# Allegro board ad9910db.brd
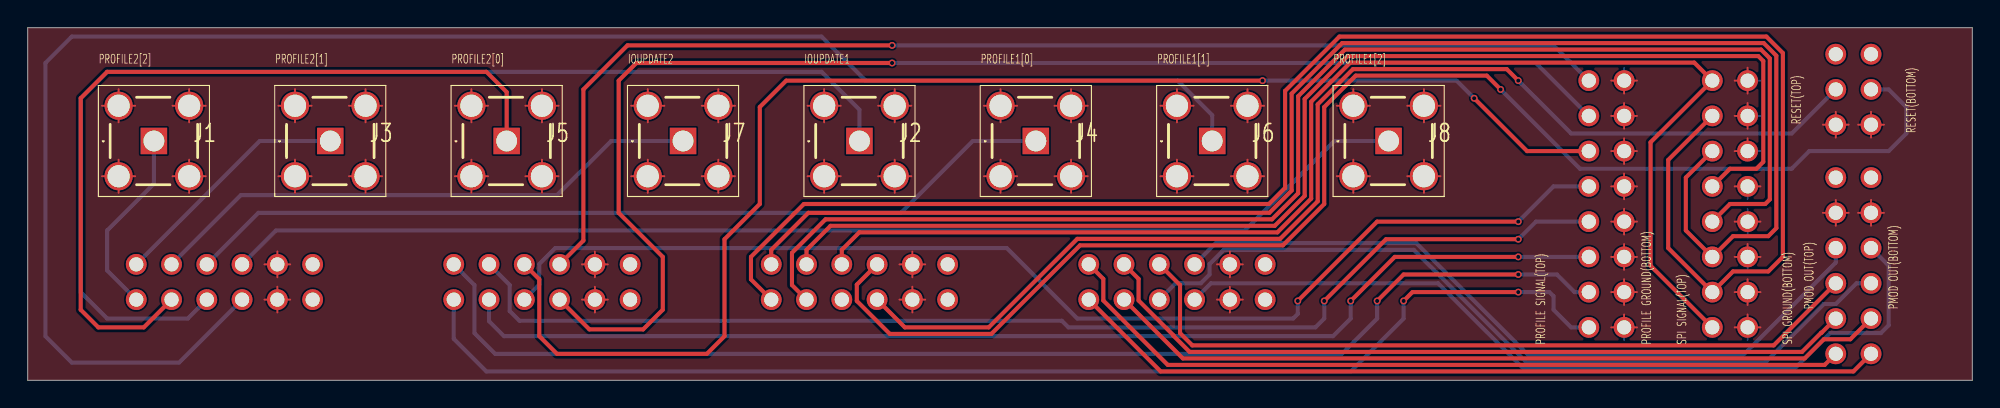
[diagram p0: board, top side]
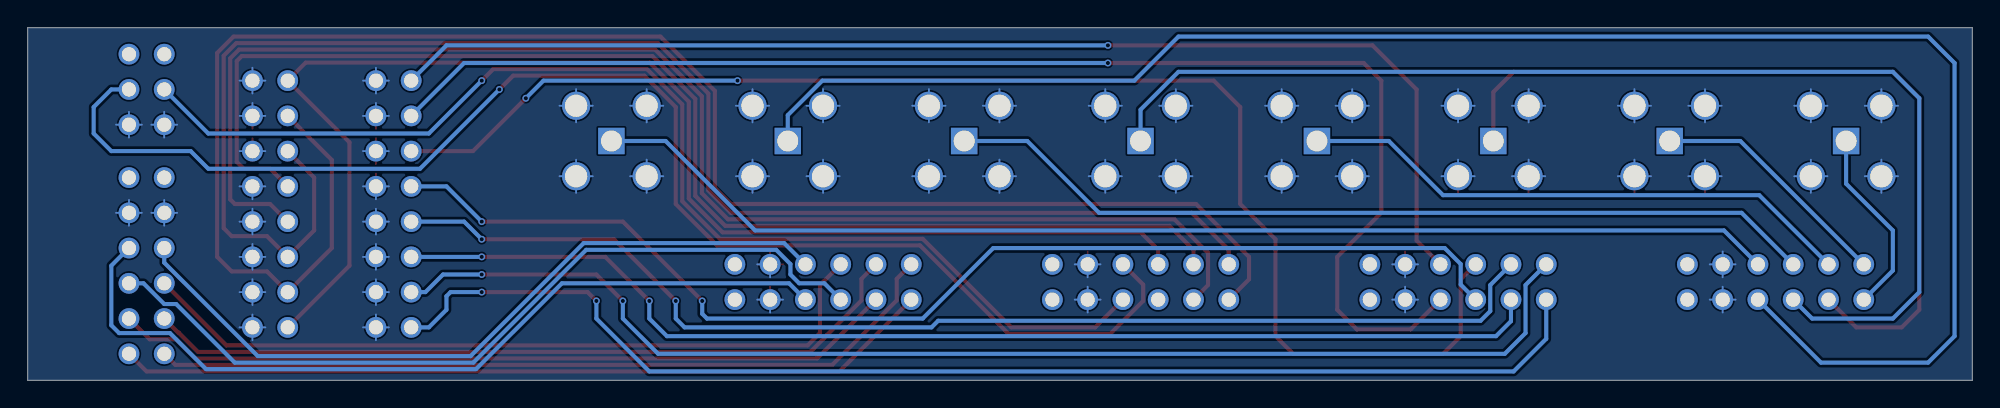
[diagram p1: board, bottom side, seen from below]

Outline 140 x 25.4 mm; copper layers: TOP, LAYER_1, LAYER_2, BOTTOM. Coordinates in mm from the lower left corner of the outline.
Outline path: 0,25.4 140,25.4 140,0 0,0 0,25.4

## Design rules (mm)
constraint set DEFAULT: min track width 0.127

## Placement (name value [footprint] x y rotation side)
J1  -  [SMA-KE-10]  9.08 17.24 0 top
J2  -  [SMA-KE-10]  59.88 17.24 0 top
J3  -  [SMA-KE-10]  21.78 17.24 0 top
J4  -  [SMA-KE-10]  72.58 17.24 0 top
J5  -  [SMA-KE-10]  34.48 17.24 0 top
J6  -  [SMA-KE-10]  85.28 17.24 0 top
J7  -  [SMA-KE-10]  47.18 17.24 0 top
J8  -  [SMA-KE-10]  97.98 17.24 0 top
J9  -  [XDZ254-2-08-Z-2_5-G1]  122.56 12.7 90 top
J10  -  [HB-PH8-25426PB2GOP]  131.44 8.26 90 top
J11  -  [XDZ254-2-08-Z-2_5-G1]  113.67 12.7 90 top
J12  -  [PH-00064]  131.44 20.95 90 top
J13  -  [HB-PH8-25426PB2GOP]  59.88 7.08 0 top
J14  -  [HB-PH8-25426PB2GOP]  37.02 7.08 0 top
J15  -  [HB-PH8-25426PB2GOP]  82.74 7.08 0 top
J16  -  [HB-PH8-25426PB2GOP]  14.16 7.08 0 top

## Library data of the parts
J1-J8 = SMA-KE-10
J9 J11 = XDZ254-2-08-Z-2_5-G1
J10 J13-J16 = HB-PH8-25426PB2GOP
J12 = PH-00064

## Footprints (pads in the part's own frame, mm; a bottom-side part is the same pattern mirrored in y, then rotated)
HB-PH8-25426PB2GOP
  round 1.5 hole 1.02: 1(-6.35,-1.27) 2(-6.35,1.27) 3(-3.81,-1.27) 4(-3.81,1.27) 5(-1.27,-1.27) 6(-1.27,1.27) 7(1.27,-1.27) 8(1.27,1.27) 9(3.81,-1.27) 10(3.81,1.27) 11(6.35,-1.27) 12(6.35,1.27)
PH-00064
  round 1.5 hole 1.02: 1(-2.54,-1.27) 2(-2.54,1.27) 3(0,-1.27) 4(0,1.27) 5(2.54,-1.27) 6(2.54,1.27)
SMA-KE-10
  round 2.032 hole 1.6: 1(2.54,2.54) 2(-2.54,2.54) 3(-2.54,-2.54) 4(2.54,-2.54)
  rect 1.905x1.905 hole 1.501: 5(0,0)
XDZ254-2-08-Z-2_5-G1
  round 1.5 hole 1.02: 1(-8.89,-1.27) 2(-8.89,1.27) 3(-6.35,-1.27) 4(-6.35,1.27) 5(-3.81,-1.27) 6(-3.81,1.27) 7(-1.27,-1.27) 8(-1.27,1.27) 9(1.27,-1.27) 10(1.27,1.27) 11(3.81,-1.27) 12(3.81,1.27) 13(6.35,-1.27) 14(6.35,1.27) 15(8.89,-1.27) 16(8.89,1.27)

## Nets
GND: J1.1 J1.2 J1.3 J1.4 J2.1 J2.2 J2.3 J2.4 J3.1 J3.2 J3.3 J3.4 J4.1 J4.2 J4.3 J4.4 J5.1 J5.2 J5.3 J5.4 J6.1 J6.2 J6.3 J6.4 J7.1 J7.2 J7.3 J7.4 J8.1 J8.2 J8.3 J8.4 J9.1 J9.3 J9.5 J9.7 J9.9 J9.11 J9.13 J9.15 J10.9 J10.10 J11.1 J11.3 J11.5 J11.7 J11.9 J11.11 J11.13 J11.15 J12.1 J12.2 J13.9 J13.10 J14.9 J14.10 J15.9 J15.10 J16.9 J16.10
CSB1: J9.10 J13.4
CSB2: J9.8 J13.3
CSB3: J10.3 J15.3
CSB4: J10.4 J15.4
EXT_IOUPDATE1: J2.5(IO) J16.5
EXT_IOUPDATE2: J7.5(IO) J16.4
EXT_PROFILE1_0: J4.5(IO) J16.6
EXT_PROFILE1_1: J6.5(IO) J16.7
EXT_PROFILE1_2: J8.5(IO) J16.8
EXT_PROFILE2_0: J5.5(IO) J16.3
EXT_PROFILE2_1: J3.5(IO) J16.2
EXT_PROFILE2_2: J1.5(IO) J16.1
EXT_PWR_DOWN1: J12.4 J13.7
EXT_PWR_DOWN2: J12.3 J13.8
EXT_PWR_DOWN3: J10.7 J15.7
EXT_PWR_DOWN4: J10.8 J15.8
FPGA_RESET: J10.5 J15.5
IOUPDATE1: J11.8 J14.4
IOUPDATE2: J11.10 J14.5
MASTERRESET1: J9.2 J9.16 J13.6
MASTERRESET2: J10.6 J15.6
PROFILE1_0: J11.6 J14.3
PROFILE1_1: J11.4 J14.2
PROFILE1_2: J11.2 J14.1
PROFILE2_0: J11.12 J14.6
PROFILE2_1: J11.14 J14.7
PROFILE2_2: J11.16 J14.8
SCLK1: J9.6 J9.12 J13.2
SCLK2: J10.2 J15.2
SDIO1: J9.4 J9.14 J13.1
SDIO2: J10.1 J15.1

Pads without a net: J10 11 12; J12 5 6; J13 5 11 12; J14 11 12; J15 11 12; J16 11 12

## Via types
v1: diameter 0.5, hole 0.3, TOP to BOTTOM, 16 vias

## Routing (per net, layer and track width the routed paths; a pad name or vN(x,y) marks a point on that pad's centre or on a via; arc(x,y) is an arc through that point)
GND: length 999.1
  TOP w0.127: J13.9 63.69,6.74 ; J13.9 63.69,4.88 ; J13.9 62.76,5.81 ; J13.9 64.62,5.81 ; 17.97,7.42 J16.10 ; J16.10 18.9,8.35 ; J16.10 17.04,8.35 ; J16.10 17.97,9.28 ; 129.25,12.06 130.18,12.06 ; 130.18,12.06 131.1,12.06 ; 130.18,12.06 130.18,12.99 ; 130.18,12.06 130.18,11.14 ; 19.24,13.51 J3.3 ; J3.3 18.05,14.7 ; J3.3 19.24,15.89 ; J3.3 20.43,14.7 ; J5.4 38.21,14.7 ; J5.4 37.02,15.89 ; J5.4 37.02,13.51 ; J5.4 35.83,14.7 ; J3.4 24.32,15.89 ; J3.4 25.51,14.7 ; J3.4 24.32,13.51 ; J3.4 23.13,14.7 ; J2.1 62.42,20.97 ; J2.1 62.42,18.59 ; J2.1 61.23,19.78 ; J2.1 63.61,19.78 ; 57.34,13.51 J2.3 ; J2.3 57.34,15.89 ; J2.3 56.15,14.7 ; J2.3 58.53,14.7 ; J1.3 7.73,14.7 ; J1.3 6.54,15.89 ; J1.3 6.54,13.51 ; J1.3 5.35,14.7 ; J11.7 115.86,11.43 ; J11.7 114.94,12.36 ; J11.7 114.94,10.5 ; J11.7 114.01,11.43 ; 131.79,18.41 J12.1 ; J12.1 133.64,18.41 ; J12.1 132.72,17.49 ; J12.1 132.72,19.34 ; 124.75,11.43 J9.7 122.9,11.43 ; 70.04,13.51 J4.3 ; J4.3 68.85,14.7 ; J4.3 70.04,15.89 ; J4.3 71.23,14.7 ; J1.1 12.81,19.78 ; J1.1 10.43,19.78 ; J1.1 11.62,20.97 ; J1.1 11.62,18.59 ; J6.2 83.93,19.78 ; J6.2 82.74,20.97 ; J6.2 82.74,18.59 ; J6.2 81.55,19.78 ; 100.52,18.59 J8.1 ; J8.1 100.52,20.97 ; J8.1 101.71,19.78 ; J8.1 99.33,19.78 ; 48.53,19.78 J7.1 ; J7.1 49.72,20.97 ; J7.1 49.72,18.59 ; J7.1 50.91,19.78 ; J7.3 45.83,14.7 ; J7.3 44.64,15.89 ; J7.3 44.64,13.51 ; J7.3 43.45,14.7 ; J8.2 95.44,20.97 ; J8.2 96.63,19.78 ; J8.2 94.25,19.78 ; J8.2 95.44,18.59 ; J3.2 19.24,20.97 ; J3.2 18.05,19.78 ; J3.2 19.24,18.59 ; J3.2 20.43,19.78 ; J11.3 114.94,7.28 ; J11.3 115.86,6.35 ; J11.3 114.01,6.35 ; J11.3 114.94,5.42 ; 122.9,16.51 J9.11 123.83,17.44 ; J11.5 114.94,9.82 ; J11.5 114.94,7.96 ; J11.5 115.86,8.89 ; J11.5 114.01,8.89 ; 17.97,4.88 J16.9 ; J16.9 17.04,5.81 ; J16.9 18.9,5.81 ; J16.9 17.97,6.74 ; 82.74,13.51 J6.3 ; J6.3 83.93,14.7 ; J6.3 81.55,14.7 ; J6.3 82.74,15.89 ; 86.63,19.78 J6.1 ; J6.1 89.01,19.78 ; J6.1 87.82,18.59 ; J6.1 87.82,20.97 ; 39.9,8.35 J14.10 ; J14.10 40.83,9.28 ; J14.10 40.83,7.42 ; J14.10 41.76,8.35 ; J5.3 31.94,15.89 ; J5.3 30.75,14.7 ; J5.3 31.94,13.51 ; J5.3 33.13,14.7 ; J8.3 95.44,15.89 ; J8.3 95.44,13.51 ; J8.3 94.25,14.7 ; J8.3 96.63,14.7 ; J15.10 87.48,8.35 ; J15.10 86.55,9.28 ; J15.10 85.62,8.35 ; J15.10 86.55,7.42 ; J11.11 114.94,17.44 ; J11.11 115.86,16.51 ; J11.11 114.01,16.51 ; J11.11 114.94,15.58 ; 131.79,12.06 132.72,12.06 ; 132.72,12.06 133.64,12.06 ; 132.72,12.06 132.72,11.14 ; 132.72,12.06 132.72,12.99 ; 31.94,18.59 J5.2 ; J5.2 31.94,20.97 ; J5.2 33.13,19.78 ; J5.2 30.75,19.78 ; J6.4 89.01,14.7 ; J6.4 87.82,15.89 ; J6.4 87.82,13.51 ; J6.4 86.63,14.7 ; J1.2 7.73,19.78 ; J1.2 6.54,20.97 ; J1.2 6.54,18.59 ; J1.2 5.35,19.78 ; 123.83,18.12 J9.13 ; J9.13 123.83,19.98 ; J9.13 122.9,19.05 ; 122.9,13.97 J9.9 124.75,13.97 ; J14.9 40.83,6.74 ; J14.9 40.83,4.88 ; J14.9 39.9,5.81 ; J14.9 41.76,5.81 ; J2.2 57.34,20.97 ; J2.2 57.34,18.59 ; J2.2 56.15,19.78 ; J2.2 58.53,19.78 ; J3.1 25.51,19.78 ; J3.1 24.32,18.59 ; J3.1 24.32,20.97 ; J3.1 23.13,19.78 ; J4.4 76.31,14.7 ; J4.4 73.93,14.7 ; J4.4 75.12,13.51 ; J4.4 75.12,15.89 ; J9.1 124.75,3.81 ; J9.1 122.9,3.81 ; J9.1 123.83,4.74 ; J11.9 114.94,14.9 ; J11.9 114.94,13.04 ; J11.9 114.01,13.97 ; J11.9 115.86,13.97 ; J15.9 87.48,5.81 ; J15.9 86.55,6.74 ; J15.9 86.55,4.88 ; J15.9 85.62,5.81 ; J7.2 44.64,20.97 ; J7.2 44.64,18.59 ; J7.2 45.83,19.78 ; J7.2 43.45,19.78 ; 114.94,18.12 J11.13 ; J11.13 114.01,19.05 ; J11.13 114.94,19.98 ; J11.13 115.86,19.05 ; 122.9,6.35 J9.3 ; J9.3 123.83,7.28 ; J9.3 124.75,6.35 ; J9.3 123.83,5.42 ; 99.33,14.7 J8.4 ; J8.4 100.52,13.51 ; J8.4 100.52,15.89 ; J8.4 101.71,14.7 ; J9.5 124.75,8.89 ; J9.5 122.9,8.89 ; J9.5 123.83,9.82 ; J1.4 12.81,14.7 ; J1.4 11.62,13.51 ; J1.4 11.62,15.89 ; J1.4 10.43,14.7 ; 63.69,7.42 J13.10 ; J13.10 62.76,8.35 ; J13.10 64.62,8.35 ; J13.10 63.69,9.28 ; J4.2 70.04,20.97 ; J4.2 71.23,19.78 ; J4.2 70.04,18.59 ; J4.2 68.85,19.78 ; 130.18,18.41 131.1,18.41 ; 130.18,18.41 129.25,18.41 ; 130.18,18.41 130.18,19.34 ; 130.18,18.41 130.18,17.49 ; J9.15 123.83,22.52 ; J9.15 122.9,21.59 ; J9.15 123.83,20.66 ; J7.4 50.91,14.7 ; J7.4 49.72,13.51 ; J7.4 49.72,15.89 ; J7.4 48.53,14.7 ; J2.4 62.42,15.89 ; J2.4 62.42,13.51 ; J2.4 63.61,14.7 ; J2.4 61.23,14.7 ; 35.83,19.78 J5.1 ; J5.1 37.02,18.59 ; J5.1 38.21,19.78 ; J5.1 37.02,20.97 ; 75.12,18.59 J4.1 ; J4.1 73.93,19.78 ; J4.1 75.12,20.97 ; J4.1 76.31,19.78 ; J11.1 115.86,3.81 ; J11.1 114.94,4.74 ; J11.1 114.01,3.81 ; 114.94,20.66 J11.15 ; J11.15 114.01,21.59 ; J11.15 115.86,21.59
  LAYER_1 w0.127: 81.55,14.7 J6.3 ; J6.3 82.74,15.89 ; J6.3 82.74,13.51 ; J6.3 83.93,14.7 ; 56.15,14.7 J2.3 ; J2.3 58.53,14.7 ; J2.3 57.34,13.51 ; J2.3 57.34,15.89 ; 123.83,5.42 J9.3 ; J9.3 123.83,7.28 ; J9.3 124.75,6.35 ; J9.3 122.9,6.35 ; 56.15,19.78 J2.2 ; J2.2 58.53,19.78 ; J2.2 57.34,18.59 ; J2.2 57.34,20.97 ; J1.1 11.62,20.97 ; J1.1 10.43,19.78 ; J1.1 11.62,18.59 ; J1.1 12.81,19.78 ; 63.69,7.42 J13.10 ; J13.10 64.62,8.35 ; J13.10 63.69,9.28 ; J13.10 62.76,8.35 ; J8.1 100.52,20.97 ; J8.1 101.71,19.78 ; J8.1 99.33,19.78 ; J8.1 100.52,18.59 ; J6.1 87.82,20.97 ; J6.1 86.63,19.78 ; J6.1 89.01,19.78 ; J6.1 87.82,18.59 ; 122.9,8.89 J9.5 ; J9.5 124.75,8.89 ; J9.5 123.83,9.82 ; J9.5 123.83,7.96 ; J14.10 41.76,8.35 ; J14.10 39.9,8.35 ; J14.10 40.83,9.28 ; J14.10 40.83,7.42 ; J15.9 87.48,5.81 ; J15.9 85.62,5.81 ; J15.9 86.55,4.88 ; J15.9 86.55,6.74 ; 24.32,18.59 J3.1 ; J3.1 24.32,20.97 ; J3.1 25.51,19.78 ; J3.1 23.13,19.78 ; 114.94,2.88 J11.1 ; J11.1 114.94,4.74 ; J11.1 115.86,3.81 ; J11.1 114.01,3.81 ; J9.15 123.83,22.52 ; J9.15 122.9,21.59 ; J9.15 124.75,21.59 ; J9.15 123.83,20.66 ; 130.18,11.14 130.18,12.06 ; 130.18,12.06 131.1,12.06 ; 130.18,12.06 129.25,12.06 ; 130.18,12.06 130.18,12.99 ; 19.24,13.51 J3.3 ; J3.3 20.43,14.7 ; J3.3 18.05,14.7 ; J3.3 19.24,15.89 ; J12.1 133.64,18.41 ; J12.1 131.79,18.41 ; J12.1 132.72,19.34 ; J12.1 132.72,17.49 ; 70.04,13.51 J4.3 ; J4.3 70.04,15.89 ; J4.3 71.23,14.7 ; J4.3 68.85,14.7 ; J9.9 124.75,13.97 ; J9.9 123.83,14.9 ; J9.9 123.83,13.04 ; J9.9 122.9,13.97 ; 86.63,14.7 J6.4 ; J6.4 87.82,15.89 ; J6.4 89.01,14.7 ; J6.4 87.82,13.51 ; J4.1 76.31,19.78 ; J4.1 75.12,18.59 ; J4.1 75.12,20.97 ; J4.1 73.93,19.78 ; J7.2 45.83,19.78 ; J7.2 44.64,20.97 ; J7.2 43.45,19.78 ; J7.2 44.64,18.59 ; J4.4 75.12,15.89 ; J4.4 73.93,14.7 ; J4.4 76.31,14.7 ; J4.4 75.12,13.51 ; 114.01,13.97 J11.9 ; J11.9 115.86,13.97 ; J11.9 114.94,14.9 ; J11.9 114.94,13.04 ; J11.5 115.86,8.89 ; J11.5 114.94,9.82 ; J11.5 114.94,7.96 ; J11.5 114.01,8.89 ; J3.4 25.51,14.7 ; J3.4 24.32,15.89 ; J3.4 24.32,13.51 ; J3.4 23.13,14.7 ; J5.2 33.13,19.78 ; J5.2 30.75,19.78 ; J5.2 31.94,18.59 ; J5.2 31.94,20.97 ; 114.01,21.59 J11.15 ; J11.15 114.94,20.66 ; J11.15 115.86,21.59 ; J11.15 114.94,22.52 ; 49.72,18.59 J7.1 ; J7.1 49.72,20.97 ; J7.1 48.53,19.78 ; J7.1 50.91,19.78 ; 70.04,18.59 J4.2 ; J4.2 71.23,19.78 ; J4.2 68.85,19.78 ; J4.2 70.04,20.97 ; 130.18,18.41 130.18,19.34 ; 130.18,18.41 131.1,18.41 ; 130.18,18.41 130.18,17.49 ; 130.18,18.41 129.25,18.41 ; 49.72,13.51 J7.4 ; J7.4 50.91,14.7 ; J7.4 49.72,15.89 ; J7.4 48.53,14.7 ; J8.3 95.44,15.89 ; J8.3 96.63,14.7 ; J8.3 95.44,13.51 ; J8.3 94.25,14.7 ; J3.2 19.24,20.97 ; J3.2 19.24,18.59 ; J3.2 18.05,19.78 ; J3.2 20.43,19.78 ; J6.2 83.93,19.78 ; J6.2 82.74,20.97 ; J6.2 82.74,18.59 ; J6.2 81.55,19.78 ; J11.13 114.94,19.98 ; J11.13 114.01,19.05 ; J11.13 115.86,19.05 ; J11.13 114.94,18.12 ; J14.9 41.76,5.81 ; J14.9 39.9,5.81 ; J14.9 40.83,4.88 ; J14.9 40.83,6.74 ; J9.7 123.83,12.36 ; J9.7 122.9,11.43 ; J9.7 124.75,11.43 ; J9.7 123.83,10.5 ; 5.35,14.7 J1.3 ; J1.3 6.54,13.51 ; J1.3 6.54,15.89 ; J1.3 7.73,14.7 ; J11.7 115.86,11.43 ; J11.7 114.01,11.43 ; J11.7 114.94,10.5 ; J11.7 114.94,12.36 ; J8.4 101.71,14.7 ; J8.4 100.52,13.51 ; J8.4 100.52,15.89 ; J8.4 99.33,14.7 ; 123.83,18.12 J9.13 ; J9.13 122.9,19.05 ; J9.13 123.83,19.98 ; J9.13 124.75,19.05 ; 123.83,15.58 J9.11 ; J9.11 122.9,16.51 ; J9.11 124.75,16.51 ; J9.11 123.83,17.44 ; J9.1 124.75,3.81 ; J9.1 123.83,4.74 ; J9.1 122.9,3.81 ; J9.1 123.83,2.88 ; 35.83,19.78 J5.1 ; J5.1 37.02,18.59 ; J5.1 37.02,20.97 ; J5.1 38.21,19.78 ; J5.4 37.02,15.89 ; J5.4 37.02,13.51 ; J5.4 38.21,14.7 ; J5.4 35.83,14.7 ; J5.3 31.94,15.89 ; J5.3 31.94,13.51 ; J5.3 33.13,14.7 ; J5.3 30.75,14.7 ; J11.11 114.94,17.44 ; J11.11 115.86,16.51 ; J11.11 114.01,16.51 ; J11.11 114.94,15.58 ; 114.01,6.35 J11.3 ; J11.3 115.86,6.35 ; J11.3 114.94,5.42 ; J11.3 114.94,7.28 ; 61.23,14.7 J2.4 ; J2.4 63.61,14.7 ; J2.4 62.42,13.51 ; J2.4 62.42,15.89 ; J15.10 86.55,9.28 ; J15.10 85.62,8.35 ; J15.10 87.48,8.35 ; J15.10 86.55,7.42 ; J1.4 11.62,15.89 ; J1.4 11.62,13.51 ; J1.4 10.43,14.7 ; J1.4 12.81,14.7 ; 17.97,4.88 J16.9 ; J16.9 17.04,5.81 ; J16.9 18.9,5.81 ; J16.9 17.97,6.74 ; J16.10 18.9,8.35 ; J16.10 17.04,8.35 ; J16.10 17.97,7.42 ; J16.10 17.97,9.28 ; 43.45,14.7 J7.3 ; J7.3 44.64,15.89 ; J7.3 45.83,14.7 ; J7.3 44.64,13.51 ; 94.25,19.78 J8.2 ; J8.2 96.63,19.78 ; J8.2 95.44,20.97 ; J8.2 95.44,18.59 ; 132.72,12.06 132.72,12.99 ; 132.72,12.06 133.64,12.06 ; 132.72,12.06 131.79,12.06 ; 132.72,12.06 132.72,11.14 ; 5.35,19.78 J1.2 ; J1.2 6.54,20.97 ; J1.2 7.73,19.78 ; J1.2 6.54,18.59 ; J2.1 62.42,20.97 ; J2.1 62.42,18.59 ; J2.1 63.61,19.78 ; J2.1 61.23,19.78 ; 62.76,5.81 J13.9 ; J13.9 63.69,4.88 ; J13.9 63.69,6.74 ; J13.9 64.62,5.81
  LAYER_2 w0.127: 35.83,19.78 J5.1 ; J5.1 38.21,19.78 ; J5.1 37.02,18.59 ; J5.1 37.02,20.97 ; J2.2 58.53,19.78 ; J2.2 56.15,19.78 ; J2.2 57.34,18.59 ; J2.2 57.34,20.97 ; J7.2 44.64,20.97 ; J7.2 45.83,19.78 ; J7.2 43.45,19.78 ; J7.2 44.64,18.59 ; J15.9 87.48,5.81 ; J15.9 86.55,6.74 ; J15.9 85.62,5.81 ; J15.9 86.55,4.88 ; J9.5 123.83,9.82 ; J9.5 122.9,8.89 ; J9.5 123.83,7.96 ; J9.5 124.75,8.89 ; 6.54,18.59 J1.2 ; J1.2 6.54,20.97 ; J1.2 7.73,19.78 ; J1.2 5.35,19.78 ; J6.1 87.82,20.97 ; J6.1 89.01,19.78 ; J6.1 87.82,18.59 ; J6.1 86.63,19.78 ; 94.25,14.7 J8.3 ; J8.3 95.44,15.89 ; J8.3 96.63,14.7 ; J8.3 95.44,13.51 ; 24.32,13.51 J3.4 ; J3.4 24.32,15.89 ; J3.4 23.13,14.7 ; J3.4 25.51,14.7 ; J15.10 87.48,8.35 ; J15.10 86.55,9.28 ; J15.10 85.62,8.35 ; J15.10 86.55,7.42 ; 62.76,5.81 J13.9 ; J13.9 63.69,6.74 ; J13.9 64.62,5.81 ; J13.9 63.69,4.88 ; 17.04,5.81 J16.9 ; J16.9 17.97,4.88 ; J16.9 18.9,5.81 ; J16.9 17.97,6.74 ; J13.10 64.62,8.35 ; J13.10 63.69,7.42 ; J13.10 63.69,9.28 ; J13.10 62.76,8.35 ; J9.15 123.83,22.52 ; J9.15 123.83,20.66 ; J9.15 122.9,21.59 ; J9.15 124.75,21.59 ; 114.94,5.42 J11.3 ; J11.3 115.86,6.35 ; J11.3 114.01,6.35 ; J11.3 114.94,7.28 ; 44.64,13.51 J7.3 ; J7.3 44.64,15.89 ; J7.3 43.45,14.7 ; J7.3 45.83,14.7 ; J4.3 70.04,15.89 ; J4.3 70.04,13.51 ; J4.3 68.85,14.7 ; J4.3 71.23,14.7 ; 73.93,14.7 J4.4 ; J4.4 75.12,13.51 ; J4.4 76.31,14.7 ; J4.4 75.12,15.89 ; J2.4 62.42,15.89 ; J2.4 62.42,13.51 ; J2.4 61.23,14.7 ; J2.4 63.61,14.7 ; J5.4 38.21,14.7 ; J5.4 35.83,14.7 ; J5.4 37.02,13.51 ; J5.4 37.02,15.89 ; J3.3 19.24,15.89 ; J3.3 20.43,14.7 ; J3.3 18.05,14.7 ; J3.3 19.24,13.51 ; J6.4 89.01,14.7 ; J6.4 86.63,14.7 ; J6.4 87.82,15.89 ; J6.4 87.82,13.51 ; J2.3 57.34,15.89 ; J2.3 56.15,14.7 ; J2.3 57.34,13.51 ; J2.3 58.53,14.7 ; 129.25,18.41 130.18,18.41 ; 130.18,18.41 130.18,19.34 ; 130.18,18.41 130.18,17.49 ; 130.18,18.41 131.1,18.41 ; 114.01,8.89 J11.5 ; J11.5 114.94,7.96 ; J11.5 115.86,8.89 ; J11.5 114.94,9.82 ; 123.83,13.04 J9.9 ; J9.9 124.75,13.97 ; J9.9 122.9,13.97 ; J9.9 123.83,14.9 ; 40.83,4.88 J14.9 ; J14.9 39.9,5.81 ; J14.9 40.83,6.74 ; J14.9 41.76,5.81 ; J11.15 114.94,22.52 ; J11.15 114.94,20.66 ; J11.15 115.86,21.59 ; J11.15 114.01,21.59 ; 123.83,5.42 J9.3 ; J9.3 122.9,6.35 ; J9.3 123.83,7.28 ; J9.3 124.75,6.35 ; 114.01,16.51 J11.11 ; J11.11 114.94,17.44 ; J11.11 114.94,15.58 ; J11.11 115.86,16.51 ; 19.24,18.59 J3.2 ; J3.2 18.05,19.78 ; J3.2 20.43,19.78 ; J3.2 19.24,20.97 ; 39.9,8.35 J14.10 ; J14.10 40.83,9.28 ; J14.10 40.83,7.42 ; J14.10 41.76,8.35 ; 49.72,13.51 J7.4 ; J7.4 50.91,14.7 ; J7.4 49.72,15.89 ; J7.4 48.53,14.7 ; 130.18,12.06 130.18,12.99 ; 130.18,12.06 131.1,12.06 ; 130.18,12.06 130.18,11.14 ; 130.18,12.06 129.25,12.06 ; J7.1 49.72,20.97 ; J7.1 48.53,19.78 ; J7.1 49.72,18.59 ; J7.1 50.91,19.78 ; 114.94,2.88 J11.1 ; J11.1 114.94,4.74 ; J11.1 114.01,3.81 ; J11.1 115.86,3.81 ; 31.94,13.51 J5.3 ; J5.3 33.13,14.7 ; J5.3 31.94,15.89 ; J5.3 30.75,14.7 ; J8.1 100.52,20.97 ; J8.1 100.52,18.59 ; J8.1 101.71,19.78 ; J8.1 99.33,19.78 ; 122.9,3.81 J9.1 ; J9.1 123.83,2.88 ; J9.1 124.75,3.81 ; J9.1 123.83,4.74 ; 11.62,13.51 J1.4 ; J1.4 12.81,14.7 ; J1.4 11.62,15.89 ; J1.4 10.43,14.7 ; J9.7 124.75,11.43 ; J9.7 123.83,12.36 ; J9.7 123.83,10.5 ; J9.7 122.9,11.43 ; J3.1 25.51,19.78 ; J3.1 24.32,20.97 ; J3.1 23.13,19.78 ; J3.1 24.32,18.59 ; J6.3 83.93,14.7 ; J6.3 82.74,15.89 ; J6.3 81.55,14.7 ; J6.3 82.74,13.51 ; J11.9 114.94,14.9 ; J11.9 114.01,13.97 ; J11.9 115.86,13.97 ; J11.9 114.94,13.04 ; J4.1 76.31,19.78 ; J4.1 75.12,18.59 ; J4.1 75.12,20.97 ; J4.1 73.93,19.78 ; 70.04,18.59 J4.2 ; J4.2 71.23,19.78 ; J4.2 68.85,19.78 ; J4.2 70.04,20.97 ; 6.54,13.51 J1.3 ; J1.3 7.73,14.7 ; J1.3 6.54,15.89 ; J1.3 5.35,14.7 ; J11.7 114.94,12.36 ; J11.7 114.94,10.5 ; J11.7 115.86,11.43 ; J11.7 114.01,11.43 ; 11.62,18.59 J1.1 ; J1.1 12.81,19.78 ; J1.1 10.43,19.78 ; J1.1 11.62,20.97 ; 99.33,14.7 J8.4 ; J8.4 101.71,14.7 ; J8.4 100.52,15.89 ; J8.4 100.52,13.51 ; 132.72,12.06 133.64,12.06 ; 132.72,12.06 131.79,12.06 ; 132.72,12.06 132.72,12.99 ; 132.72,12.06 132.72,11.14 ; J6.2 83.93,19.78 ; J6.2 82.74,18.59 ; J6.2 81.55,19.78 ; J6.2 82.74,20.97 ; J12.1 132.72,19.34 ; J12.1 132.72,17.49 ; J12.1 131.79,18.41 ; J12.1 133.64,18.41 ; J11.13 115.86,19.05 ; J11.13 114.94,19.98 ; J11.13 114.01,19.05 ; J11.13 114.94,18.12 ; J9.11 124.75,16.51 ; J9.11 123.83,15.58 ; J9.11 122.9,16.51 ; J9.11 123.83,17.44 ; 31.94,18.59 J5.2 ; J5.2 33.13,19.78 ; J5.2 30.75,19.78 ; J5.2 31.94,20.97 ; 17.04,8.35 J16.10 ; J16.10 17.97,7.42 ; J16.10 17.97,9.28 ; J16.10 18.9,8.35 ; 94.25,19.78 J8.2 ; J8.2 96.63,19.78 ; J8.2 95.44,20.97 ; J8.2 95.44,18.59 ; 123.83,18.12 J9.13 ; J9.13 122.9,19.05 ; J9.13 124.75,19.05 ; J9.13 123.83,19.98 ; 62.42,18.59 J2.1 ; J2.1 61.23,19.78 ; J2.1 62.42,20.97 ; J2.1 63.61,19.78
  BOTTOM w0.127: 114.01,21.59 J11.15 ; J11.15 114.94,20.66 ; J11.15 114.94,22.52 ; J11.15 115.86,21.59 ; 131.79,12.06 132.72,12.06 ; 132.72,12.06 132.72,12.99 ; 132.72,12.06 132.72,11.14 ; 132.72,12.06 133.64,12.06 ; 132.72,17.49 J12.1 ; J12.1 132.72,19.34 ; J12.1 133.64,18.41 ; J12.1 131.79,18.41 ; 44.64,18.59 J7.2 ; J7.2 44.64,20.97 ; J7.2 45.83,19.78 ; J7.2 43.45,19.78 ; 123.83,20.66 J9.15 ; J9.15 122.9,21.59 ; J9.15 123.83,22.52 ; J9.15 124.75,21.59 ; 123.83,7.96 J9.5 ; J9.5 124.75,8.89 ; J9.5 123.83,9.82 ; J9.5 122.9,8.89 ; 114.94,2.88 J11.1 ; J11.1 114.94,4.74 ; J11.1 114.01,3.81 ; J11.1 115.86,3.81 ; J8.3 96.63,14.7 ; J8.3 95.44,13.51 ; J8.3 94.25,14.7 ; J8.3 95.44,15.89 ; 122.9,16.51 J9.11 124.75,16.51 ; 17.04,5.81 J16.9 ; J16.9 17.97,4.88 ; J16.9 18.9,5.81 ; J16.9 17.97,6.74 ; 100.52,13.51 J8.4 ; J8.4 99.33,14.7 ; J8.4 100.52,15.89 ; J8.4 101.71,14.7 ; 11.62,13.51 J1.4 ; J1.4 11.62,15.89 ; J1.4 12.81,14.7 ; J1.4 10.43,14.7 ; 114.01,19.05 J11.13 ; J11.13 115.86,19.05 ; J11.13 114.94,19.98 ; 123.83,10.5 J9.7 ; J9.7 122.9,11.43 ; J9.7 123.83,12.36 ; J9.7 124.75,11.43 ; 49.72,13.51 J7.4 ; J7.4 48.53,14.7 ; J7.4 50.91,14.7 ; J7.4 49.72,15.89 ; 129.25,12.06 130.18,12.06 ; 130.18,12.06 130.18,11.14 ; 130.18,12.06 130.18,12.99 ; 130.18,12.06 131.1,12.06 ; 6.54,13.51 J1.3 ; J1.3 5.35,14.7 ; J1.3 6.54,15.89 ; J1.3 7.73,14.7 ; J9.3 123.83,7.28 ; J9.3 122.9,6.35 ; J9.3 124.75,6.35 ; J9.3 123.83,5.42 ; J9.13 124.75,19.05 ; J9.13 123.83,19.98 ; J9.13 122.9,19.05 ; 75.12,18.59 J4.1 ; J4.1 73.93,19.78 ; J4.1 75.12,20.97 ; J4.1 76.31,19.78 ; 85.62,5.81 J15.9 ; J15.9 86.55,4.88 ; J15.9 87.48,5.81 ; 17.97,7.42 J16.10 ; J16.10 17.04,8.35 ; J16.10 18.9,8.35 ; J16.10 17.97,9.28 ; 87.48,8.35 J15.10 86.55,7.42 ; 48.53,19.78 J7.1 ; J7.1 50.91,19.78 ; J7.1 49.72,20.97 ; J7.1 49.72,18.59 ; J2.1 63.61,19.78 ; J2.1 61.23,19.78 ; J2.1 62.42,18.59 ; J2.1 62.42,20.97 ; 114.01,11.43 J11.7 ; J11.7 115.86,11.43 ; J11.7 114.94,10.5 ; J11.7 114.94,12.36 ; 23.13,14.7 J3.4 ; J3.4 24.32,15.89 ; J3.4 25.51,14.7 ; J1.2 6.54,20.97 ; J1.2 6.54,18.59 ; J1.2 7.73,19.78 ; J1.2 5.35,19.78 ; J11.5 114.94,9.82 ; J11.5 115.86,8.89 ; J11.5 114.01,8.89 ; J11.5 114.94,7.96 ; 18.05,14.7 J3.3 ; J3.3 19.24,15.89 ; J3.3 20.43,14.7 ; 122.9,13.97 J9.9 ; J9.9 124.75,13.97 ; J9.9 123.83,13.04 ; J3.1 24.32,20.97 ; J3.1 23.13,19.78 ; J3.1 25.51,19.78 ; J3.1 24.32,18.59 ; 114.94,5.42 J11.3 ; J11.3 114.01,6.35 ; J11.3 114.94,7.28 ; J11.3 115.86,6.35 ; 86.63,19.78 J6.1 ; J6.1 87.82,20.97 ; J6.1 89.01,19.78 ; J6.1 87.82,18.59 ; J8.2 95.44,20.97 ; J8.2 94.25,19.78 ; J8.2 95.44,18.59 ; J8.2 96.63,19.78 ; 35.83,14.7 J5.4 ; J5.4 38.21,14.7 ; J5.4 37.02,15.89 ; J5.2 31.94,20.97 ; J5.2 30.75,19.78 ; J5.2 31.94,18.59 ; J5.2 33.13,19.78 ; J5.3 31.94,15.89 ; J5.3 30.75,14.7 ; J5.3 33.13,14.7 ; J2.4 63.61,14.7 ; J2.4 61.23,14.7 ; J2.4 62.42,15.89 ; J2.4 62.42,13.51 ; 37.02,18.59 J5.1 ; J5.1 35.83,19.78 ; J5.1 38.21,19.78 ; J5.1 37.02,20.97 ; 62.76,8.35 J13.10 ; J13.10 63.69,7.42 ; J13.10 64.62,8.35 ; J3.2 20.43,19.78 ; J3.2 18.05,19.78 ; J3.2 19.24,20.97 ; J3.2 19.24,18.59 ; J8.1 100.52,20.97 ; J8.1 99.33,19.78 ; J8.1 100.52,18.59 ; J8.1 101.71,19.78 ; 39.9,5.81 J14.9 ; J14.9 40.83,4.88 ; J14.9 40.83,6.74 ; J14.9 41.76,5.81 ; 130.18,18.41 131.1,18.41 ; 130.18,18.41 130.18,19.34 ; 130.18,18.41 129.25,18.41 ; 130.18,18.41 130.18,17.49 ; 122.9,3.81 J9.1 ; J9.1 123.83,2.88 ; J9.1 124.75,3.81 ; J9.1 123.83,4.74 ; J2.2 58.53,19.78 ; J2.2 56.15,19.78 ; J2.2 57.34,18.59 ; J2.2 57.34,20.97 ; 81.55,14.7 J6.3 ; J6.3 82.74,15.89 ; J6.3 82.74,13.51 ; J6.3 83.93,14.7 ; 70.04,13.51 J4.3 ; J4.3 71.23,14.7 ; J4.3 68.85,14.7 ; J4.3 70.04,15.89 ; J1.1 12.81,19.78 ; J1.1 11.62,20.97 ; J1.1 10.43,19.78 ; J1.1 11.62,18.59 ; 63.69,4.88 J13.9 ; J13.9 62.76,5.81 ; J13.9 63.69,6.74 ; J13.9 64.62,5.81 ; J14.10 41.76,8.35 ; J14.10 39.9,8.35 ; J14.10 40.83,7.42 ; J6.2 83.93,19.78 ; J6.2 82.74,18.59 ; J6.2 82.74,20.97 ; J6.2 81.55,19.78 ; 86.63,14.7 J6.4 ; J6.4 87.82,15.89 ; J6.4 87.82,13.51 ; J6.4 89.01,14.7 ; J7.3 44.64,15.89 ; J7.3 43.45,14.7 ; J7.3 45.83,14.7 ; J7.3 44.64,13.51 ; 114.01,13.97 J11.9 ; J11.9 115.86,13.97 ; J11.9 114.94,13.04 ; J4.2 70.04,20.97 ; J4.2 68.85,19.78 ; J4.2 71.23,19.78 ; J4.2 70.04,18.59 ; 75.12,13.51 J4.4 ; J4.4 76.31,14.7 ; J4.4 75.12,15.89 ; J4.4 73.93,14.7 ; J2.3 58.53,14.7 ; J2.3 57.34,13.51 ; J2.3 57.34,15.89 ; J2.3 56.15,14.7 ; 115.86,16.51 J11.11 114.01,16.51
CSB1: length 91.6
  TOP w0.294: J13.4 56.07,9.4 57.8,11.13 89.78,11.13 91.94,13.28 91.94,20.27 95.03,23.36 124.6,23.36 124.96,23 124.96,15.74 124.46,15.24 122.56,15.24 121.28,13.97
CSB2: length 99.6
  TOP w0.294: J13.3 55.02,6.86 55.02,9.18 57.44,11.6 89.58,11.6 91.47,13.48 91.47,20.46 94.83,23.83 124.79,23.83 125.43,23.19 125.43,13.03 125.09,12.7 122.56,12.7 121.28,11.43
CSB3: length 56.7
  TOP w0.294: J15.3 83.17,1.57 127.94,1.57 129.32,2.95 131.22,2.95 J10.3
CSB4: length 55.8
  TOP w0.294: 130.18,4.45 129.15,3.42 129.12,3.42 127.74,2.04 83.65,2.04 82.49,3.2 82.49,3.23 79.98,5.75 79.98,7.3 J15.4
EXT_IOUPDATE1: length 84.6
  BOTTOM w0.294: J2.5 59.88,19.5 57.15,22.23 5.71,22.23 3.81,20.32 3.81,6.35 5.71,4.45 11.53,4.45 J16.5
EXT_IOUPDATE2: length 40.5
  BOTTOM w0.294: J16.4 15.34,13.34 38.1,13.34 42.01,17.24 J7.5
EXT_PROFILE1_0: length 63.4
  BOTTOM w0.294: J16.6 16.61,12.06 62.87,12.06 68.04,17.24 J4.5
EXT_PROFILE1_1: length 125.5
  BOTTOM w0.294: J6.5 85.28,19.1 82.79,21.59 60.33,21.59 57.15,24.77 3.17,24.77 1.27,22.86 1.27,3.17 3.17,1.27 10.89,1.27 J16.7
EXT_PROFILE1_2: length 86.2
  BOTTOM w0.294: J16.8 17.88,10.79 87.63,10.79 94.08,17.24 J8.5
EXT_PROFILE2_0: length 58.7
  TOP w0.294: J5.5 34.48,20.77 33.02,22.23 5.71,22.23 3.81,20.32 3.81,5.08 5.08,3.81 8.35,3.81 J16.3
EXT_PROFILE2_1: length 17.7
  BOTTOM w0.294: J3.5 16.7,17.24 J16.2
EXT_PROFILE2_2: length 13.7
  BOTTOM w0.294: J16.1 5.71,7.91 5.71,10.79 9.08,14.16 J1.5
EXT_PWR_DOWN1: length 84.9
  TOP w0.294: v1(107.31,21.59) 106.49,22.42 95.41,22.42 92.88,19.88 92.88,12.89 90.17,10.19 75.56,10.19 69.19,3.81 63.15,3.81 J13.7
  BOTTOM w0.294: 130.18,20.95 127,17.78 111.12,17.78 v1(107.31,21.59)
EXT_PWR_DOWN2: length 100.4
  TOP w0.294: J13.8 59.69,6.89 59.69,5.71 62.06,3.34 69.38,3.34 75.76,9.72 90.36,9.72 93.34,12.7 93.34,19.69 95.61,21.95 105.05,21.95 v1(106.05,20.95)
  BOTTOM w0.294: v1(106.05,20.95) 111.76,15.24 127,15.24 128.27,16.51 133.99,16.51 135.25,17.78 135.25,19.68 133.99,20.95 J12.3
EXT_PWR_DOWN3: length 60.4
  BOTTOM w0.294: J15.7 85.19,6.99 101.54,6.99 107.73,0.8 127.17,0.8 129.76,3.4 133.42,3.4 133.99,3.96 133.99,8.26 J10.7
EXT_PWR_DOWN4: length 54
  BOTTOM w0.294: J15.8 85.54,9.88 99.97,9.88 108.12,1.74 123.44,1.74 130.18,8.48 130.18,9.53
FPGA_RESET: length 58.9
  BOTTOM w0.294: 132.72,6.99 131.67,6.99 130.18,5.49 129.32,5.49 125.09,1.27 107.92,1.27 99.79,9.4 86.12,9.4 85.09,8.37 85.09,7.62 84.45,6.99 82.64,6.99 J15.5
IOUPDATE1: length 86.1
  TOP w0.294: v1(107.31,10.16) 97.79,10.16 v1(93.34,5.71)
  BOTTOM w0.294: v1(107.31,10.16) 108.58,11.43 J11.8 ; J14.4 34.7,6.86 34.7,4.98 35.4,4.28 74.46,4.28 74.93,3.81 92.71,3.81 93.34,4.45 v1(93.34,5.71)
IOUPDATE2: length 85.6
  TOP w0.294: v1(107.31,11.43) 97.16,11.43 v1(91.44,5.71)
  BOTTOM w0.294: J14.5 36.83,6.89 36.83,8.37 37.98,9.53 70.48,9.53 75.56,4.45 91.1,4.45 91.44,4.79 v1(91.44,5.71) ; J11.10 109.86,13.97 v1(107.31,11.43)
MASTERRESET1: length 95.4
  TOP w0.294: J13.6 58.61,9.4 59.87,10.66 89.97,10.66 92.41,13.09 92.41,20.07 95.22,22.89 119.99,22.89 121.28,21.59 116.84,17.14 116.84,8.26 121.28,3.81
MASTERRESET2: length 55
  TOP w0.294: J15.6 82.96,6.86 82.96,3.4 83.85,2.51 125.7,2.51 130.18,6.99
PROFILE1_0: length 84.3
  TOP w0.294: v1(95.25,5.71) 98.42,8.89 v1(107.31,8.89)
  BOTTOM w0.294: J14.3 33.21,4.25 34.29,3.17 93.98,3.17 95.25,4.45 v1(95.25,5.71) ; v1(107.31,8.89) J11.6
PROFILE1_1: length 90.1
  TOP w0.294: v1(107.31,7.62) 99.06,7.62 v1(97.16,5.71)
  BOTTOM w0.294: J11.4 111.37,6.35 110.1,7.62 v1(107.31,7.62) ; J14.2 32.16,6.86 32.16,3.4 33.65,1.91 94.61,1.91 97.16,4.45 v1(97.16,5.71)
PROFILE1_2: length 90.3
  TOP w0.294: v1(107.31,6.35) 99.69,6.35 v1(99.06,5.71)
  BOTTOM w0.294: J14.1 30.67,2.98 33.02,0.64 95.25,0.64 99.06,4.45 v1(99.06,5.71) ; J11.2 111.12,3.81 109.86,5.08 109.86,6.06 109.56,6.35 v1(107.31,6.35)
PROFILE2_0: length 100.2
  TOP w0.294: J14.6 36.83,7.27 36.83,3.17 38.1,1.91 48.9,1.91 50.16,3.17 50.16,10.16 52.7,12.7 52.7,19.68 54.61,21.59 v1(88.9,21.59) ; v1(104.14,20.32) 107.95,16.51 J11.12
  BOTTOM w0.294: v1(104.14,20.32) 102.87,21.59 v1(88.9,21.59)
PROFILE2_1: length 98.7
  TOP w0.294: v1(62.23,22.86) 43.81,22.86 42.55,21.59 42.55,12.06 45.72,8.89 45.72,5.08 44.31,3.67 40.43,3.67 J14.7
  BOTTOM w0.294: J11.14 108.58,22.86 v1(62.23,22.86)
PROFILE2_2: length 88.1
  TOP w0.294: v1(62.23,24.13) 43.18,24.13 40.01,20.95 40.01,10.06 J14.8
  BOTTOM w0.294: v1(62.23,24.13) 109.86,24.13 J11.16
SCLK1: length 111.1
  TOP w0.294: 121.28,16.51 119.38,14.61 119.38,10.79 121.28,8.89 122.78,10.38 125.32,10.38 125.9,10.96 125.9,23.39 124.99,24.3 94.64,24.3 91,20.66 91,13.67 89.39,12.06 56.2,12.06 53.53,9.4 J13.2
SCLK2: length 58
  TOP w0.294: J15.2 77.44,7.3 77.44,5.75 82.08,1.1 129.37,1.1 130.18,1.91
SDIO1: length 125.3
  TOP w0.294: 121.28,19.05 118.11,15.88 118.11,9.53 121.28,6.35 122.78,7.84 125.32,7.84 126.36,8.89 126.36,23.58 125.18,24.77 94.44,24.77 90.53,20.85 90.53,13.87 89.36,12.7 55.88,12.7 52.07,8.89 52.07,7.27 J13.1
SDIO2: length 59
  TOP w0.294: J15.1 81.56,0.64 131.44,0.64 132.72,1.91

## Copper pours and planes (outline as drawn; the poured copper is in the pictures)
GND on TOP: 0,25.4 140,25.4 140,0 0,0 ; 3 cut-outs
GND on BOTTOM: 0,25.4 140,25.4 140,0 0,0 ; 3 cut-outs
GND on LAYER_1, LAYER_2: 0,25.4 140,25.4 140,0 0,0

## Text on the board
Ref Des/Silkscreen Top: PROFILE2[2] | PROFILE2[1] | PROFILE2[0] | IOUPDATE2 | IOUPDATE1 | PROFILE1[0] | PROFILE1[1] | PROFILE1[2] | PROFILE SIGNAL(TOP) | PROFILE GROUND(BOTTOM) | SPI SIGNAL(TOP) | SPI GROUND(BOTTOM) | RESET(TOP) | PMOD OUT(TOP) | PMOD OUT(BOTTOM) | RESET(BOTTOM)
NCLEGEND-1-4: FIGURE | FINISHED_SIZE | 0.3 | 1.02 | 1.5011 | 1.6002 | DRILL CHART: TOP to BOTTOM | ALL UNITS ARE IN MILLIMETERS | DRILLED_SIZE | - | PLATED | QTY | 16 | 98 | 8 | 32
